# Altium PCB PC110-itx.PcbDoc (part 9 of 16)
Units mm, origin at the board's own origin, x right, y up, seen from the top; angles counter-clockwise.
Board outline 170 x 170 mm, 16 copper layers (FC1, FC2, FC3, FC4, IP1, IC1, IC2, IP2, IP3, IC3, IC4, IP4, BC4, BC3, BC2, BC1), stack 3.903 mm thick; 935 components, 1357 nets, 4698 pads, 3240 vias.
Unrouted connection lines stored in the file: 552.
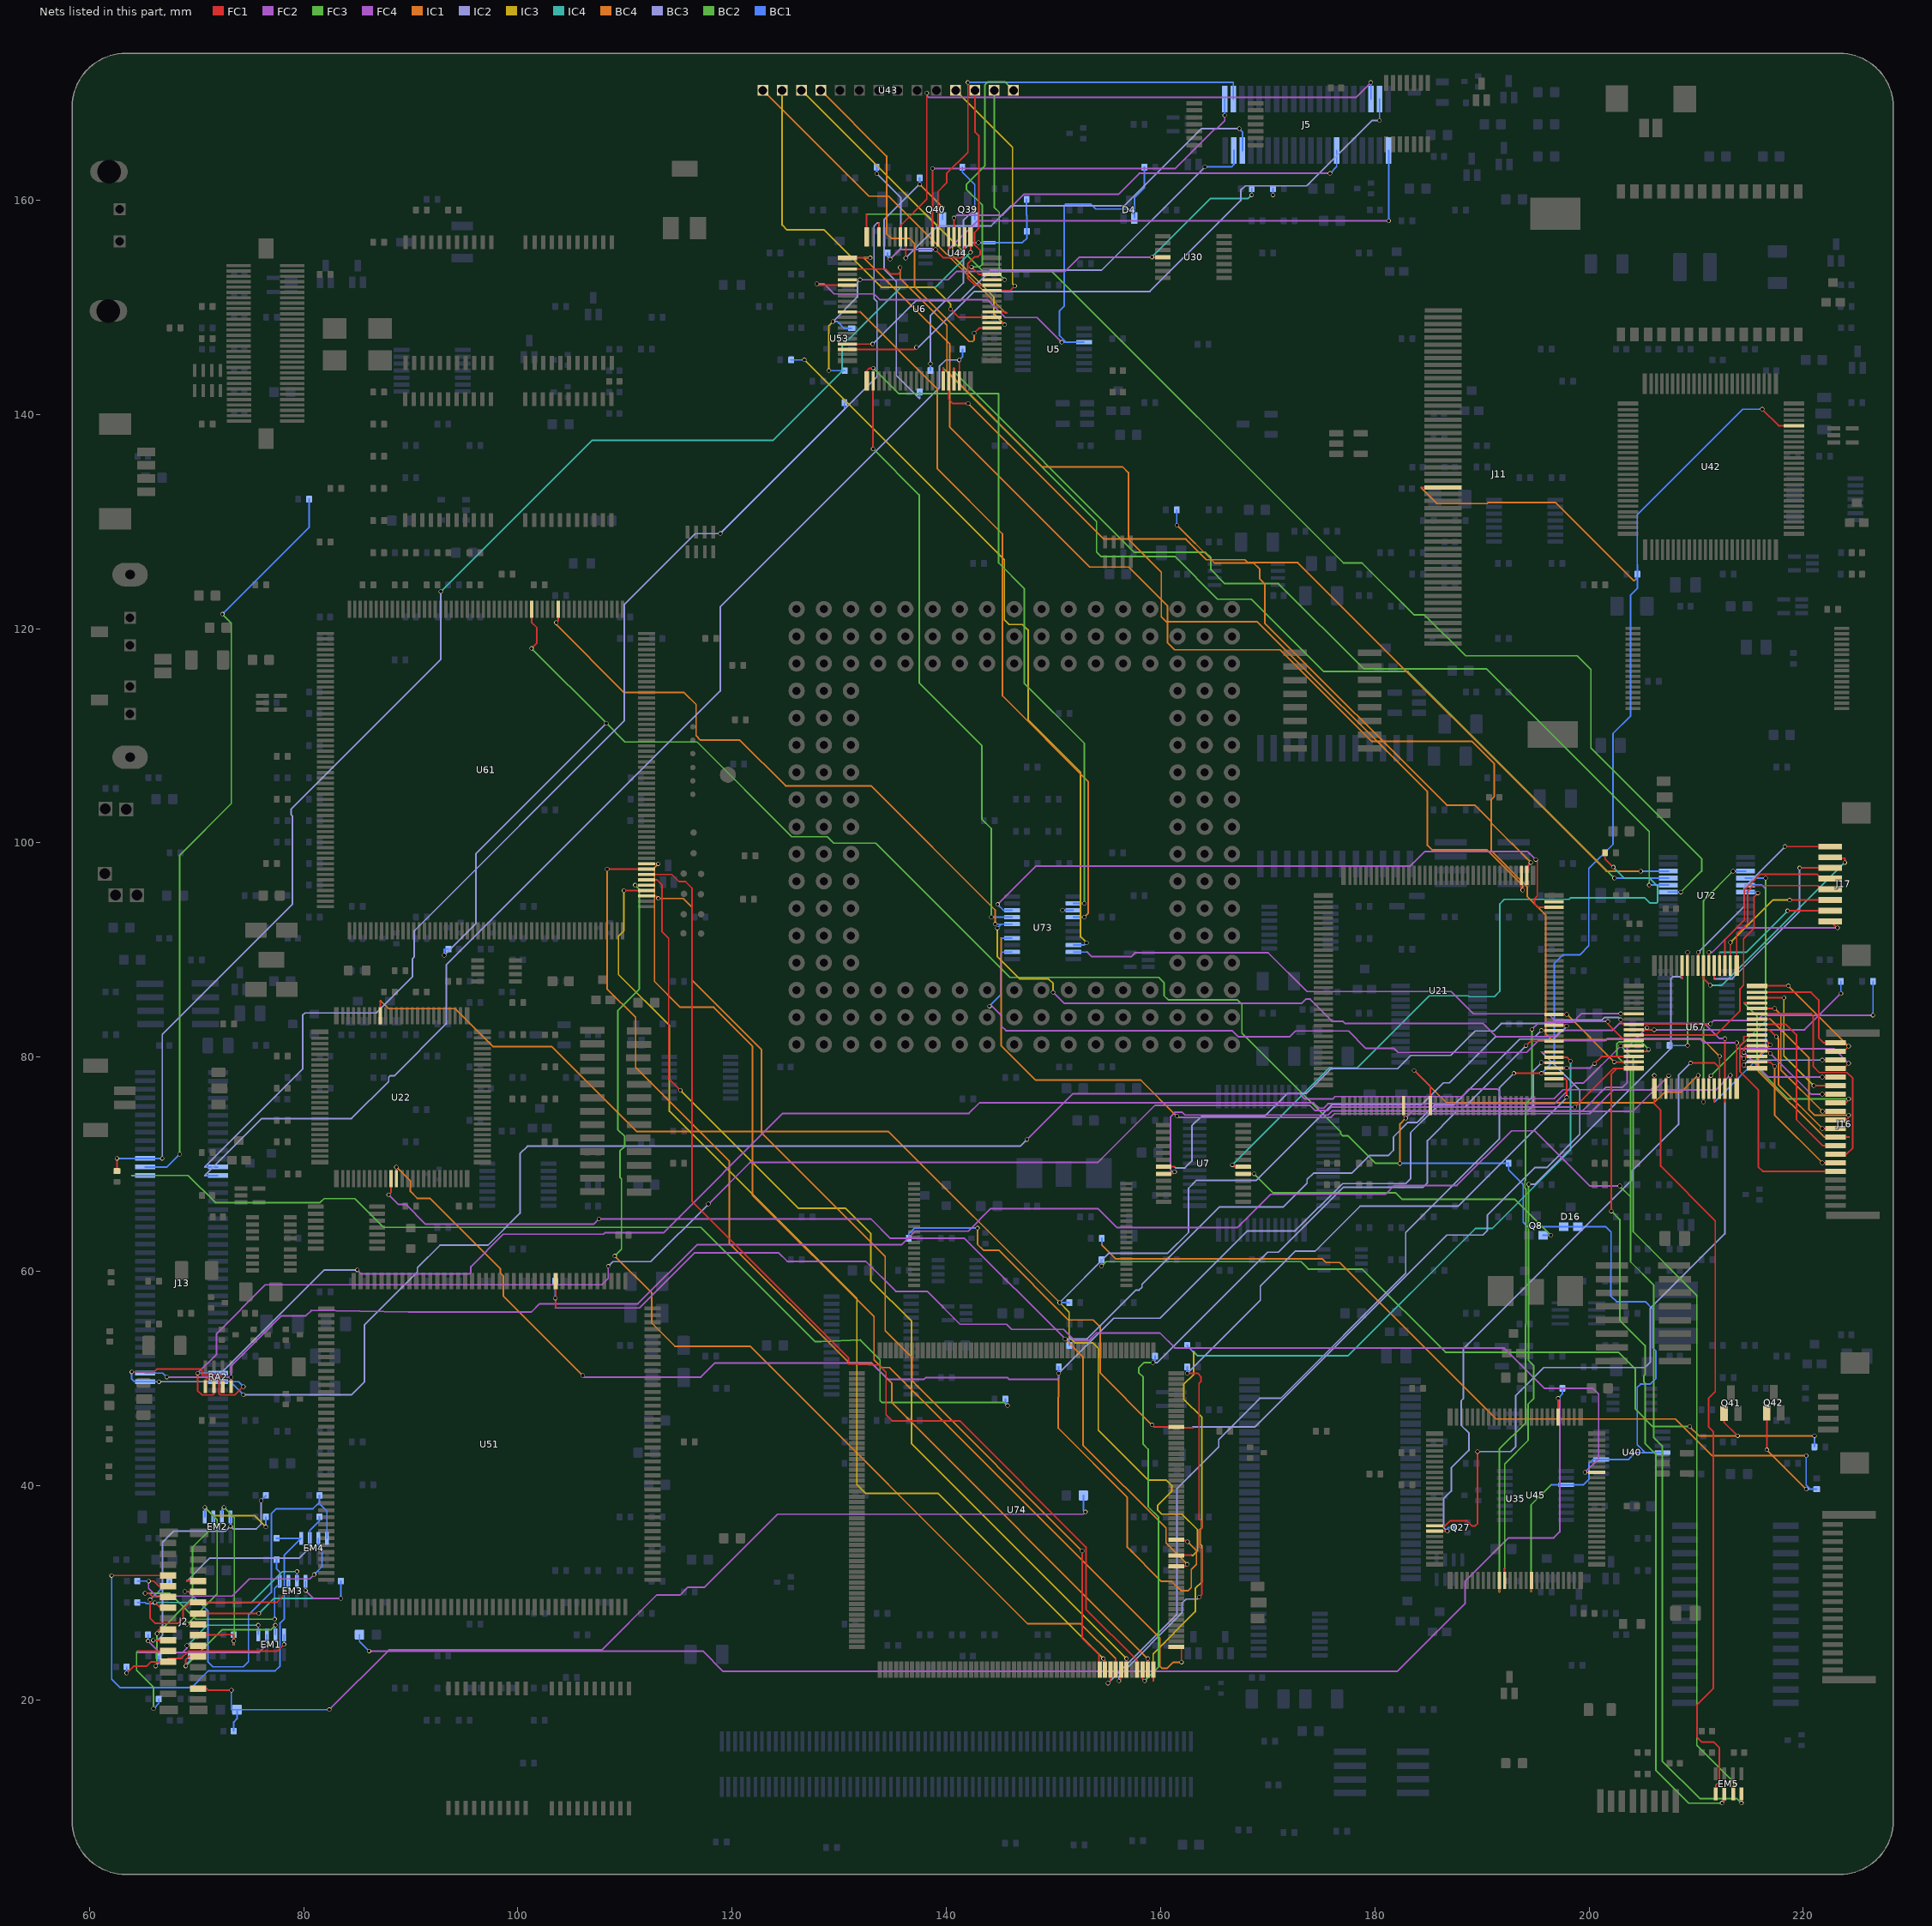
[diagram p22: the nets of this part, all layers, seen from the top]

## Via types
v1: diameter 0.4, hole 0.3, FC1 to BC1, 3240 vias

## Nets (pads, with @x,y where several pads share a name; then routed paths per layer and width w, separated by ;. In a path a pad name is that pad's centre, name@x,y a point inside that pad or via, vN(x,y) a via of type N, cw(c..) or ccw(c..) an arc to the next point about the centre after c; other vN are vias at no path point) (continued)
IRQ4: R384.2 U21.84 U22.36 U74.172 | length 159.7
  FC1 w0.15: v1(87.935,67.158) 88.15,67.373 U22.36@88.15,68.66 ; U74.172@161.458,32.469 162.298,32.469 v1(162.494,32.664) ; U21.84@196.732,82.991 197.831,82.991 v1(197.917,82.906)
  FC2 w0.15: v1(107.568,64.897) 132.969,64.897 134.772,63.094 141.68,63.094 v1(151.084,53.69)
  IC1 w0.15: v1(151.084,53.69) 152.75,52.024 152.75,43.795 160.503,36.043 160.503,34.655 v1(162.494,32.664)
  IC2 w0.15: v1(151.084,53.69) 153.156,53.69 157.723,58.257 158.002,58.257 158.266,58.522 158.266,58.8 165.498,66.031 171.467,66.031 173.677,68.241 173.677,68.58 174.272,69.175 177.837,69.175 179.48,70.818 181.254,70.818 181.74,71.303 181.74,72.545 183.099,73.905 183.963,73.905 185.615,75.557 187.393,75.557 193.522,81.686 196.697,81.686 v1(197.917,82.906)
  FC4 w0.15: v1(87.935,67.158) 88.823,66.269 89.534,66.269 91.389,64.414 107.086,64.414 v1(107.568,64.897)
  BC1 w0.15: v1(151.084,53.69) 151.242,53.69 151.49,53.442 R384.2@151.49,53.09
IRQ5: R387.2 U21.83 U22.92 U74.174 | length 171.4
  FC1 w0.15: U22.92@87.15,83.86 87.15,85.22 ; U74.174@161.458,33.469 162.154,33.469 162.212,33.527 162.864,33.527 ; v1(195.546,82.491) U21.83@196.732,82.491
  IC2 w0.15: v1(150.571,57.09) 155.178,61.697 160.655,61.697 162.608,63.65 162.608,67.765 163.347,68.504 168.949,68.504 176.01,75.565 184.379,75.565 186.42,77.606 186.979,77.606 191.288,81.916 194.971,81.916 v1(195.546,82.491)
  IC3 w0.15: v1(150.571,57.09) 151.46,56.201 151.46,53.873 151.994,53.34 153.67,53.34 154.178,52.832 154.178,45.187 158.852,40.513 160.528,40.513 161.061,39.98 161.061,39.497 159.715,38.151 159.715,37.744 160.122,37.338 162.001,37.338 163.449,35.89 163.449,33.934 162.984,33.469 162.864,33.527
  BC4 w0.15: 87.15,85.22 87.198,85.268 87.935,84.531 94.139,84.531 97.696,80.975 103.183,80.975 111.081,73.076 134.585,73.076 v1(150.571,57.09)
  BC1 w0.15: v1(150.571,57.09) R387.2@151.49,57.09
IRQ7: R389.2 U21.81 U22.37 U74.177 | length 169.2
  FC1 w0.15: U22.37@88.65,68.66 v1(88.65,69.748) ; U74.177@161.458,34.969 162.154,34.969 162.223,34.9 162.375,34.9 v1(162.509,34.766) ; v1(194.115,81.085) 194.521,81.491 U21.81@196.732,81.491
  IC1 w0.15: v1(88.65,69.748) 89.966,68.432 89.966,67.462 90.601,66.828 91.795,66.828 98.376,60.247 98.376,59.837 98.654,59.56 98.654,57.683 v1(106.045,50.292) ; 150.49,50.089 150.495,50.089 ; 150.49,50.094 150.495,50.089 ; v1(162.509,34.766) 163.347,33.928 163.347,32.639 162.864,32.156 162.864,30.501 162.571,30.208 161.893,30.208 161.036,31.064 160.071,31.064 156.896,34.239 156.896,38.913 150.444,45.364 150.444,48.26 150.495,48.311 150.495,50.089
  IC2 w0.15: v1(150.49,50.49) 155.626,55.626 159.944,55.626 168.097,63.779 172.568,63.779 176.987,68.199 182.88,68.199 183.337,68.656 183.337,72.942 185.723,75.327 188.357,75.327 v1(194.115,81.085)
  FC4 w0.15: v1(106.045,50.292) 106.197,50.14 117.095,50.14 118.415,51.461 132.987,51.461 134.517,49.932 137.928,49.932 138.085,50.089 145.696,50.089 145.859,49.925 150.326,49.925 150.49,50.089
  BC1 w0.15: 150.49,50.094 v1(150.49,50.49) R389.2@150.49,51.09
IRQ9: R325.2 U21.79 U74.198 | length 97
  FC1 w0.15: v1(159.197,45.672) 159.4,45.469 U74.198@161.458,45.469 162.133,45.469 162.133,45.411 162.959,45.411 ; 195.556,80.491 U21.79@196.732,80.491
  IC2 w0.15: 162.959,45.411 163.017,45.469 168.786,45.469 186.715,63.398 190.094,63.398 190.5,63.805 190.5,65.253 194.946,69.698 196.038,69.698 199.136,72.796 199.136,76.911 195.556,80.491
  BC4 w0.15: v1(142.9,64.041) 142.9,62.535 143.459,61.976 144.882,61.976 151.384,55.474 153.695,55.474 154.366,54.803 154.366,50.503 v1(159.197,45.672)
  BC1 w0.15: R325.2@136.49,63.09 136.49,63.523 137.008,64.041 v1(142.9,64.041)
IRQ10: R394.2 U21.78 U74.156 | length 89
  FC1 w0.15: 159.308,21.793 U74.156@159.308,22.819 ; U21.78@196.732,79.991 197.917,79.991 v1(198.272,79.635)
  IC3 w0.15: 159.309,21.792 159.309,24.308 163.246,28.245 163.246,30.404 163.855,31.013 163.855,34.392 163.703,34.544 163.703,35.942 163.855,36.093 163.855,46.381 162.154,48.082 162.154,49.454 163.093,50.394 163.093,52.474 ; 163.056,52.474 163.093,52.474 ; 163.115,52.474 163.093,52.474
  IC4 w0.15: 163.115,52.474 163.469,52.121 177.495,52.121 189.389,64.015 190.964,64.015 198.272,71.323 v1(198.272,79.635)
  BC1 w0.15: R394.2@162.49,53.09 162.49,53.04 163.056,52.474
IRQ11: R396.2 U21.77 U74.154 | length 87.2
  FC1 w0.15: U74.154@158.308,22.819 158.308,21.971 v1(158.511,21.768) ; v1(195.555,79.502) 195.566,79.491 U21.77@196.732,79.491
  FC3 w0.15: v1(158.511,21.768) 159.817,23.073 159.817,37.059 158.845,38.03 158.845,43.39 158.369,43.866 158.369,50.13 157.963,50.536 157.963,51.003 158.45,51.49 v1(159.287,51.49)
  IC2 w0.15: v1(159.287,51.49) 159.693,51.49 170.001,61.798 170.993,61.798 177.063,67.869 184.506,67.869 184.912,68.275 184.912,72.212 187.655,74.955 194.259,74.955 194.793,75.489 194.793,78.74 v1(195.555,79.502)
  BC1 w0.15: v1(159.287,51.49) 159.49,51.693 R396.2@159.49,52.09
IRQ14: J11.24 R365.1 U21.75 U42.46 U74.148 | length 181
  FC1 w0.15: v1(155.092,21.565) 155.308,21.78 U74.148@155.308,22.819 ; 184.328,133.173 J11.24@186.358,133.173 ; v1(192.969,78.491) v1(195.555,78.491) U21.75@196.732,78.491 ; v1(216.154,140.487) 217.691,138.95 U42.46@219.127,138.95
  BC4 w0.15: 184.328,133.172 185.815,131.685 190.475,131.685 190.565,131.775 196.875,131.775 204.165,124.485 204.231,124.485
  BC3 w0.15: v1(155.092,21.565) 161.533,28.006 161.533,39.726 165.431,43.623 165.431,44.317 169.266,48.151 171.214,48.151 182.88,59.817 182.88,63.626 191.618,72.364 191.618,77.14 v1(192.969,78.491)
  BC1 w0.15: v1(195.555,78.491) 196.748,79.685 196.748,88.748 197.545,89.545 199.12,89.545 199.974,90.399 199.974,97.612 202.235,99.873 202.235,110.211 203.886,111.862 203.886,123.139 204.51,123.763 204.51,124.765 ; 204.231,124.485 204.51,124.765 ; v1(216.154,140.487) 214.325,140.487 204.495,130.658 204.495,125.984 204.51,125.969 R365.1@204.51,125.09 204.51,124.765
IRQ15: R391.2 U21.74 U74.150 | length 85.5
  FC1 w0.15: v1(156.108,21.768) 156.308,21.967 U74.150@156.308,22.819 ; v1(162.49,50.49) 163.454,50.49 163.779,50.165 163.779,49.759 163.585,49.564 163.585,36.913 163.855,36.642 163.855,36.017 163.601,35.763 163.601,34.29 163.855,34.036 163.855,29.845 v1(163.601,29.591) ; U21.74@196.732,77.991 197.714,77.991 197.917,77.788 v1(197.917,76.251)
  IC2 w0.15: v1(162.49,50.49) 169.316,57.316 169.316,58.649 172.556,61.888 174.416,61.888 178.618,66.09 187.756,66.09 v1(197.917,76.251)
  BC3 w0.15: v1(156.108,21.768) 156.108,22.225 162.001,28.118 162.001,29.032 162.38,29.411 163.421,29.411 v1(163.601,29.591)
  BC1 w0.15: v1(162.49,50.49) R391.2@162.49,51.09
KB1_0: J17.8 U67.56 | length 18.7
  FC1 w0.15: U67.56@210.185,88.558 v1(210.185,89.789) ; v1(218.288,99.663) J17.8@222.504,99.663
  IC2 w0.15: v1(210.185,89.789) 214.459,94.063 214.459,95.834 v1(218.288,99.663)
KB1_1: J17.7 U67.55 | length 21.2
  FC1 w0.15: U67.55@210.685,88.558 210.685,87.333 v1(211.303,86.716) ; J17.7@222.504,98.663 223.876,98.552 v1(223.876,98.171)
  IC4 w0.15: v1(211.303,86.716) 212.42,86.716 v1(223.876,98.171)
KB1_2: J17.1 U67.54 | length 15.1
  FC1 w0.15: U67.54@211.185,88.558 v1(211.185,89.789) ; J17.1@222.504,92.663 v1(223.19,92.075)
  FC4 w0.15: v1(211.185,89.789) 211.48,89.789 213.766,92.075 v1(223.19,92.075)
KB1_3: J17.6 U67.53 | length 18.7
  FC1 w0.15: 211.685,87.327 U67.53@211.685,88.558 ; v1(219.659,97.663) J17.6@222.504,97.663
  IC2 w0.15: 211.685,87.327 211.684,87.325 213.361,87.325 219.659,93.623 v1(219.659,97.663)
KB1_4: J17.2 U67.52 | length 13.2
  FC1 w0.15: U67.52@212.185,88.558 212.185,89.782 ; v1(218.542,93.663) J17.2@222.504,93.663
  IC4 w0.15: 212.185,89.782 212.192,89.789 214.668,89.789 v1(218.542,93.663)
KB1_5: J17.5 U67.51 | length 16.6
  FC1 w0.15: U67.51@212.685,88.558 212.685,90.994 214.503,92.812 214.503,95.606 215.976,97.079 221.275,97.079 221.691,96.663 J17.5@222.504,96.663
KB1_6: J17.3 U67.50 | length 13.1
  FC1 w0.15: U67.50@213.185,88.558 v1(213.185,90.706) ; v1(218.719,94.663) J17.3@222.504,94.663
  IC3 w0.15: v1(213.185,90.706) 217.142,94.663 v1(218.719,94.663)
KB1_7: J17.4 U67.49 | length 15.4
  FC1 w0.15: U67.49@213.785,88.558 213.785,91.484 214.808,92.507 214.808,95.504 215.316,96.012 221.342,96.012 221.691,95.663 J17.4@222.504,95.663
KB2_1: J16.18 U67.33 | length 10.2
  FC1 w0.15: v1(214.452,79.273) 214.452,79.085 U67.33@215.685,78.958 ; v1(221.767,79.731) 221.78,79.743 J16.18@223.012,79.743
  IC2 w0.15: v1(214.452,79.273) 214.909,79.731 v1(221.767,79.731)
KB2_2: J16.6 U67.34 | length 13.9
  FC1 w0.15: U67.34@215.685,79.558 216.911,79.558 v1(217.322,79.146) ; v1(221.767,70.143) J16.6@223.012,70.143
  IC1 w0.15: v1(217.322,79.146) 217.322,74.588 v1(221.767,70.143)
KB2_3: J16.17 U67.35 | length 14.5
  FC1 w0.15: v1(214.452,79.858) 214.653,80.058 U67.35@215.685,80.058 ; J16.17@223.012,78.943 223.749,78.943 v1(224.231,79.426)
  FC2 w0.15: v1(214.452,79.858) 214.097,80.213 214.097,80.67 214.224,80.797 222.859,80.797 v1(224.231,79.426)
KB2_4: J16.14 U67.36 | length 9
  FC1 w0.15: U67.36@215.685,80.558 216.713,80.558 v1(216.916,80.355) ; v1(221.767,76.543) J16.14@223.012,76.543
  FC4 w0.15: v1(216.916,80.355) 220.728,76.543 v1(221.767,76.543)
KB2_5: J16.16 U67.37 | length 11.2
  FC1 w0.15: v1(214.452,80.442) 214.452,80.829 214.681,81.058 U67.37@215.685,81.058 ; v1(221.767,78.143) J16.16@223.012,78.143
  FC2 w0.15: v1(214.452,80.442) 216.751,78.143 v1(221.767,78.143)
KB2_6: J16.9 U67.38 | length 16.6
  FC1 w0.15: U67.38@215.685,81.558 216.637,81.558 216.637,81.432 v1(216.916,81.153) ; J16.9@223.012,72.543 224.256,72.543
  BC4 w0.15: v1(216.916,81.153) 215.798,80.035 215.798,78.689 221.945,72.542 224.257,72.542
KB2_7: J16.5 U67.39 | length 21.7
  FC1 w0.15: U67.39@215.685,82.058 214.452,81.931 214.452,81.458 214.097,81.102 214.097,78.664 215.798,76.962 215.798,69.749 216.205,69.343 J16.5@223.012,69.343
KB2_8: J16.10 U67.40 | length 13.7
  FC1 w0.15: U67.40@215.685,82.558 216.832,82.558 v1(217.474,81.916) ; v1(221.767,73.343) J16.10@223.012,73.343
  IC1 w0.15: v1(217.474,81.916) 217.677,81.712 217.677,77.433 v1(221.767,73.343)
KB2_9: J16.8 U67.41 | length 16.6
  FC1 w0.15: U67.41@215.685,83.058 218.389,83.058 219.354,82.093 219.354,74.181 221.793,71.743 J16.8@223.012,71.743
KB2_10: J16.11 U67.42 | length 16.6
  FC1 w0.15: U67.42@215.685,83.558 216.908,83.558 ; J16.11@223.012,74.143 224.003,74.143 224.231,74.371 v1(224.231,74.574)
  BC4 w0.15: 216.908,83.558 216.916,83.566 220.523,79.959 220.523,75.133 221.082,74.574 v1(224.231,74.574)
KB2_11: J16.7 U67.43 | length 22.6
  FC1 w0.15: U67.43@215.685,84.058 220.767,84.058 220.929,83.896 220.929,79.121 221.488,78.562 224.079,78.562 224.612,78.029 224.612,71.526 224.029,70.943 J16.7@223.012,70.943
KB2_12: J16.12 U67.44 | length 14.3
  FC1 w0.15: U67.44@215.685,84.558 v1(217.321,84.558) ; v1(221.78,74.943) J16.12@223.012,74.943
  IC1 w0.15: v1(217.321,84.558) 217.907,83.972 217.907,78.815 v1(221.78,74.943)
KB2_13: J16.13 U67.45 | length 19
  FC1 w0.15: 214.459,85.058 U67.45@215.685,85.058 ; J16.13@223.012,75.743 223.977,75.743 224.231,75.997 v1(224.231,76.098)
  BC2 w0.15: 214.459,85.058 215.697,83.82 215.697,78.994 218.592,76.098 v1(224.231,76.098)
KB2_14: J16.15 U67.46 | length 13.9
  FC1 w0.15: U67.46@215.685,85.558 v1(218.186,85.558) ; v1(220.98,77.343) J16.15@223.012,77.343
  IC3 w0.15: v1(218.186,85.558) 218.186,80.137 v1(220.98,77.343)
KB2_15: J16.20 U67.47 | length 11.4
  FC1 w0.15: U67.47@215.685,86.058 220.723,86.058 221.437,85.344 221.437,81.8 221.894,81.343 J16.20@223.012,81.343
KB2_16: J16.19 U67.48 | length 12.3
  FC1 w0.15: U67.48@215.685,86.658 v1(218.599,86.658) ; J16.19@223.012,80.543 223.749,80.543 v1(224.231,81.026)
  IC1 w0.15: v1(218.599,86.658) v1(224.231,81.026)
KB_CAPLED#: U67.27 U72.4 | length 23.7
  FC1 w0.15: U67.27@211.185,77.058 211.185,78.089 v1(211.379,78.283)
  FC3 w0.15: v1(211.379,78.283) 216.484,83.388 v1(216.484,96.715)
  BC1 w0.15: U72.4@214.6,96.715 v1(216.484,96.715)
KB_CNTR#: U35.61 U67.59 | length 65.8
  FC1 w0.15: U35.61@192.12,31.15 192.12,32.227 ; 208.685,87.327 U67.59@208.685,88.558
  FC3 w0.15: 192.12,32.227 192.126,32.233 192.126,42.037 194.308,44.22 194.308,47.623 194.843,48.158 194.843,51.181 194.361,51.664 v1(194.361,68.148)
  IC2 w0.15: v1(194.361,68.148) 194.97,68.148 207.624,80.802 207.624,87.325 207.8,87.501 208.51,87.501 208.685,87.327
KB_INIT1: EM5.5 J13.14 RA2.5 U67.17 | length 235
  FC1 w0.15: RA2.5@70.825,49.24 70.825,49.886 70.952,50.013 71.882,50.013 72.111,49.784 72.111,48.565 72.212,48.463 73.584,48.463 v1(74.371,49.251) ; v1(206.096,78.288) 206.085,78.278 U67.17@206.085,77.058 206.085,75.652 206.68,75.057 206.68,69.825 211.785,64.719 211.785,48.768 211.15,48.133 211.15,45.491 211.607,45.034 211.607,21.09 210.083,19.566 210.083,16.498 210.515,16.067 211.619,16.067 212.166,15.519 212.166,12.37 211.825,12.029 EM5.5@211.825,11.24
  FC2 w0.15: v1(147.523,72.314) 151.785,76.576 172.984,76.576 173.462,76.098 176.06,76.098 176.29,76.328 188.113,76.328 188.824,77.038 191.414,77.038 191.618,76.834 191.618,76.403 191.898,76.124 196.723,76.124 197.561,76.962 205.765,76.962 206.096,77.292 v1(206.096,78.288)
  IC2 w0.15: v1(74.371,48.489) 84.48,48.489 85.674,49.682 85.674,55.009 90.617,59.951 90.617,60.339 92.732,62.454 97.227,62.454 100.203,65.43 100.203,71.001 100.891,71.689 146.898,71.689 v1(147.523,72.314)
  BC1 w0.15: J13.14@72.008,49.703 73.157,49.703 ; v1(74.371,48.489) 73.157,49.703 ; v1(74.371,49.251) 73.919,49.703 73.157,49.703
KB_INIT2: EM5.6 J13.15 RA2.6 U67.16 | length 230
  FC1 w0.15: v1(70.104,50.503) 70.104,48.87 70.51,48.463 71.523,48.463 71.625,48.565 RA2.6@71.625,49.24 ; v1(198.664,75.336) 202.286,78.958 202.605,78.958 ; v1(202.082,65.634) 202.082,78.435 202.605,78.958 ; U67.16@204.185,78.958 202.605,78.958 ; v1(212.42,10.363) 212.625,10.568 EM5.6@212.625,11.24
  FC3 w0.15: v1(202.082,65.634) 202.87,64.846 202.87,55.448 205.232,53.086 205.232,50.377 205.12,50.265 205.12,49.667 205.232,49.555 205.232,43.942 206.223,42.951 206.223,13.437 209.296,10.363 v1(212.42,10.363)
  IC2 w0.15: v1(108.433,60.477) 108.864,60.909 112.394,60.909 v1(117.78,66.294)
  FC4 w0.15: v1(70.104,50.503) 71.882,52.281 71.882,54.204 76.429,58.75 107.848,58.75 108.433,59.334 v1(108.433,60.477) ; v1(117.78,66.294) 121.666,70.18 154.153,70.18 159.486,75.514 173.925,75.514 174.421,75.018 175.591,75.018 175.91,75.336 v1(198.664,75.336)
  BC1 w0.15: v1(70.104,50.503) J13.15@72.008,50.503
KB_INIT3: EM5.8 J13.86 RA2.8 U67.13 | length 237.3
  FC1 w0.15: RA2.8@73.225,49.24 v1(73.225,50.12) ; U67.13@204.185,80.558 205.399,80.558 v1(205.562,80.721) ; v1(214.225,10.363) EM5.8@214.225,11.24
  FC3 w0.15: v1(202.87,67.97) 203.875,66.965 ; v1(205.562,80.721) 204.851,81.432 202.794,81.432 202.59,81.229 202.59,80.137 203.875,78.852 203.875,66.965 ; v1(214.225,10.363) 213.819,10.77 210.363,10.77 206.832,14.3 206.832,43.713 206.033,44.512 206.033,58.736 203.875,60.895 203.875,66.965
  FC4 w0.15: v1(67.216,50.14) 73.205,50.14 v1(73.225,50.12) 73.225,51.152 77.927,55.855 80.213,55.855 80.721,56.363 89.79,56.21 101.269,56.21 102.032,56.972 111.201,56.972 116.713,62.484 135.814,62.484 137.084,63.754 142.037,63.754 144.145,65.862 154.152,65.862 155.905,64.11 167.183,64.11 170.272,67.199 180.998,67.199 181.821,68.021 187.655,68.021 192.761,73.127 194.945,73.127 200.101,67.97 v1(202.87,67.97)
  BC1 w0.15: J13.86@65.207,50.503 66.853,50.503 v1(67.216,50.14)
KB_INIT4: EM5.7 J13.87 RA2.7 U67.12 | length 239.4
  FC1 w0.15: v1(63.957,50.622) 66.04,50.622 66.319,50.902 70.393,50.902 70.495,50.8 70.495,50.317 72.136,50.317 72.45,50.003 RA2.7@72.45,49.24 ; v1(202.955,81.058) U67.12@204.185,81.058 ; EM5.7@213.45,11.24 213.45,11.95 v1(213.653,12.153)
  FC3 w0.15: v1(202.955,81.058) 204.114,79.899 204.114,63.703 210.058,57.76 210.058,15.748 v1(213.653,12.153)
  IC2 w0.15: v1(66.489,49.703) 71.496,49.703 81.94,60.147 v1(85.014,60.147)
  FC4 w0.15: v1(85.014,60.147) 85.395,59.766 95.453,59.766 95.614,59.927 95.614,60.449 98.635,63.471 107.979,63.471 108.11,63.602 113.589,63.602 124.739,74.752 142.113,74.752 143.104,75.744 174.294,75.744 174.79,75.248 175.222,75.248 175.628,75.654 196.787,75.654 198.73,77.597 199.494,77.597 v1(202.955,81.058)
  BC1 w0.15: v1(63.957,50.622) 63.957,49.957 64.211,49.703 J13.87@65.207,49.703 v1(66.489,49.703)
KB_IRQ1: U21.86 U67.15 | length 9.3
  FC1 w0.15: U21.86@196.732,83.991 v1(197.917,83.991) ; v1(202.35,79.558) U67.15@204.185,79.558
  BC4 w0.15: v1(197.917,83.991) v1(202.35,79.558)
KB_IRQ12: U21.76 U67.14 | length 7.9
  FC1 w0.15: U21.76@196.732,78.991 v1(197.917,78.991) ; v1(200.51,79.4) 201.168,80.058 U67.14@204.185,80.058
  FC2 w0.15: v1(197.917,78.991) 200.101,78.991 v1(200.51,79.4)
KB_KBCSMI: U67.32 U73.12 | length 84
  FC1 w0.15: U67.32@213.785,77.058 v1(213.785,81.356)
  FC2 w0.15: v1(144.018,84.76) 144.272,84.76 145.136,83.896 145.136,82.906 145.567,82.474 166.675,82.474 167.234,81.915 172.06,81.915 172.593,82.448 177.546,82.448 179.172,80.823 181.788,80.823 182.169,80.442 194.182,80.442 195.299,81.559 201.524,81.559 201.676,81.711 210.338,81.711 210.693,81.356 v1(213.785,81.356)
  BC1 w0.15: v1(144.018,84.76) 145.059,85.801 145.059,89.611 145.263,89.815 U73.12@146.137,89.815
KB_NUMLED#: U67.26 U72.3 | length 25.1
  FC1 w0.15: v1(210.685,75.819) U67.26@210.685,77.058
  FC3 w0.15: v1(210.685,75.819) 210.685,94.607 v1(213.436,97.358)
  BC1 w0.15: v1(213.436,97.358) 213.443,97.365 U72.3@214.6,97.365
KB_PADLED#: U67.28 U72.5 | length 25.1
  FC1 w0.15: 211.685,75.82 U67.28@211.685,77.058
  BC1 w0.15: 211.685,75.82 216.484,80.62 216.484,95.709 216.129,96.065 U72.5@214.6,96.065
KB_RESET#: C267.2 D16.1 D16.3 R109.2 U21.48 U35.66 U40.4 U40.10 U45.3 U61.70 U67.19 | length 244.2
  FC1 w0.15: v1(101.27,118.161) 101.777,118.668 101.777,120.092 101.278,120.591 U61.70@101.278,121.807 ; U21.48@182.682,75.491 182.682,74.514 v1(182.885,74.311) ; 194.589,30.099 194.62,30.13 U35.66@194.62,31.15 ; U67.19@207.185,77.058 207.185,78.026 v1(207.442,78.283)
  FC2 w0.15: v1(182.885,74.311) 183.53,74.955 204.114,74.955 v1(207.442,78.283)
  FC3 w0.15: 194.589,30.099 194.589,38.202 196.453,40.065
  IC1 w0.15: v1(182.347,70.079) 182.347,73.772 v1(182.885,74.311)
  BC2 w0.15: v1(101.27,118.161) v1(108.255,111.176) 110.007,109.423 116.738,109.423 125.578,100.584 128.88,100.584 129.489,99.974 133.401,99.974 145.924,87.451 159.843,87.451 160.325,86.97 160.325,85.75 160.731,85.344 167.183,85.344 167.589,84.938 167.589,82.245 176.81,73.024 176.81,72.847 176.987,72.67 177.495,72.67 180.075,70.09 182.347,70.09 182.358,70.09 v1(182.347,70.079)
  BC3 w0.15: v1(93.116,89.51) 96.088,92.481 96.088,99.009 v1(108.255,111.176)
  BC1 w0.15: v1(93.116,89.51) 93.116,90.09 C267.2@93.52,90.09 ; v1@182.358,70.09 R109.2@192.49,70.09 192.49,69.49 193.853,68.127 193.853,64.578 194.259,64.172 D16.1@197.622,64.172 D16.3@198.947,64.172 201.574,64.172 202.057,63.689 202.057,60.173 202.032,60.147 202.032,57.709 202.565,57.175 205.257,57.175 205.943,56.49 205.943,52.857 206.223,52.578 206.223,49.987 205.715,49.479 204.8,49.479 204.495,49.174 204.495,43.827 205.232,43.09 ; 196.453,40.065 U45.3@197.862,40.065 199.45,40.065 200,40.615 200,42.084 200.355,42.44 U40.10@201.138,42.44 203.657,42.44 204.307,43.09 205.232,43.09 ; U40.4@206.863,43.09 205.232,43.09
KB_RXD: U67.11 U73.9 | length 56.2
  FC1 w0.15: v1(201.752,83.337) 201.752,83.116 203.31,81.558 U67.11@204.185,81.558
  FC2 w0.15: 153.161,89.815 153.187,89.789 153.187,89.762 153.567,89.383 157.251,89.383 157.607,89.738 170.053,89.738 173.66,86.131 187.122,86.131 189.205,84.048 196.19,84.048 196.901,83.337 v1(201.752,83.337)
  BC1 w0.15: U73.9@151.862,89.815 153.161,89.815
KB_SCLK#: R45.1 U7.8 U67.9 | length 78.7
  FC1 w0.15: U7.8@160.288,69.115 161.139,69.115 v1(161.315,69.291) ; U67.9@204.185,82.558 205.212,82.558 ; v1(205.415,82.761) 205.212,82.558 ; v1(206.07,82.558) 205.415,82.558 205.212,82.558
  FC4 w0.15: v1(161.315,69.291) 161.104,69.291 160.934,69.461 160.934,74.447 161.341,74.854 162.019,74.854 162.273,74.6 175.634,74.6 176.014,74.981 199.365,74.981 201.574,77.191 203.124,77.191 203.556,77.622 203.556,80.902 v1(205.415,82.761) ; v1(206.07,82.558) 220.114,82.558 v1(223.51,85.954)
  BC1 w0.15: v1(223.51,85.954) R45.1@223.51,87.09
KB_SCLK_shift: Q8.3 U7.17 | length 31.8
  FC1 w0.15: U7.17@167.712,69.115 v1(168.731,69.115)
  BC2 w0.15: v1(168.731,69.115) 170.511,67.335 181.966,67.335 182.575,66.726 193.083,66.726 v1(196.436,63.373)
  BC1 w0.15: Q8.3@195.7,63.365 196.428,63.365 v1(196.436,63.373)
KB_SCRLED#: U21.53 U67.25 | length 34
  FC1 w0.15: v1(183.667,78.765) 185.182,77.251 U21.53@185.182,75.491 ; U67.25@210.185,77.058 v1(210.185,78.308)
  BC4 w0.15: v1(183.667,78.765) 186.69,75.743 206.07,75.743 207.086,76.759 208.636,76.759 v1(210.185,78.308)
KB_Sound: R78.1 U67.58 | length 11.6
  FC1 w0.15: U67.58@209.185,88.558 209.185,89.78 v1(209.194,89.789)
  FC3 w0.15: v1(209.194,81.09) v1(209.194,89.789)
  BC1 w0.15: R78.1@207.51,81.09 v1(209.194,81.09)
KB_SPKDN: U35.43 U61.65 U67.30 U73.16 | length 200.9
  FC1 w0.15: v1(103.581,120.58) 103.778,120.777 U61.65@103.778,121.807 ; U35.43@185.57,36.25 186.563,36.25 187.017,36.704 188.595,36.704 189.053,36.246 189.382,36.246 189.586,36.449 v1(189.586,43.18) ; 212.685,75.83 U67.30@212.685,77.058 v1(212.685,81.737)
  FC2 w0.15: v1(149.962,86.055) 150.978,85.039 173.19,85.039 173.571,85.42 173.965,85.42 176.046,83.339 177.037,83.339 177.241,83.134 190.123,83.134 191.354,81.903 196.762,81.903 197.355,82.496 202.187,82.496 202.824,83.134 210.769,83.134 212.166,81.737 v1(212.685,81.737)
  IC3 w0.15: v1(144.755,92.05) 144.755,89.408 146.863,87.3 149.555,87.3 149.962,86.893 v1(149.962,86.055)
  BC4 w0.15: v1(103.581,120.58) 103.581,120.377 109.912,114.046 115.519,114.046 116.637,112.928 116.637,110.007 117.043,109.601 120.723,109.601 124.99,105.334 132.974,105.334 144.551,93.756 v1(144.551,92.415)
  BC3 w0.15: v1(189.586,43.18) 192.684,43.18 193.142,43.637 193.142,48.387 195.783,51.029 205.232,51.029 205.715,51.511 205.715,56.54 212.674,63.5 212.674,75.819 212.685,75.83
  BC1 w0.15: v1(144.551,92.415) 145.12,92.415 ; v1(144.755,92.05) 145.12,92.415 ; U73.16@146.137,92.415 145.12,92.415
KB_SPKUP: Q27.3 R268.1 U35.44 U67.29 | length 146
  FC1 w0.15: U35.44@185.57,35.75 v1(186.766,35.75) ; v1(209.474,79.451) 211.734,79.451 212.185,79.001 ; U67.29@212.185,77.058 212.185,79.001 ; v1(212.185,80.086) 212.185,79.001
  IC1 w0.15: v1(161.519,129.667) 165.049,126.136 168.681,126.136 169.24,125.578 169.24,124.689 169.723,124.206 169.723,120.523 186.715,103.53 189.334,103.53 190.881,101.983 190.881,99.258 194.224,95.916 194.224,95.006 195.936,93.294 195.936,82.194 196.515,81.615 201.631,81.615 201.727,81.711 210.56,81.711 v1(212.185,80.086)
  BC3 w0.15: v1(186.766,35.75) 186.411,36.106 186.411,38.76 187.141,39.491 187.141,41.652 188.773,43.284 188.773,44.933 188.062,45.644 188.062,47.926 188.268,48.132 188.268,52.784 203.987,68.504 203.987,69.342 208.356,73.711 208.356,78.334 v1(209.474,79.451)
  BC1 w0.15: R268.1@161.51,131.09 161.51,129.676 v1(161.519,129.667) ; v1(186.766,35.75) 186.766,35.966 186.89,36.09 Q27.3@187.35,36.09
KB_SPKUP_DN: J13.63 R262.1 | length 95.2
  BC2 w0.15: 63.966,68.953 63.957,68.961 69.215,68.961 71.755,66.421 81.535,66.421 81.916,66.801 84.767,66.801 87.456,64.112 117.094,64.112 127.761,53.445 128.323,53.445 131.978,53.594 133.807,51.765 133.807,47.955 133.986,47.777 145.416,47.777 v1(145.72,47.473)
  BC1 w0.15: 63.966,68.953 J13.63@65.207,68.953 ; R262.1@145.51,48.09 145.51,47.682 v1(145.72,47.473)
KB_SRDY#: R59.1 U7.7 U67.8 | length 77.9
  FC1 w0.15: U7.7@160.288,69.765 161.307,69.765 ; v1(202.946,83.49) 202.946,83.312 203.2,83.058 U67.8@204.185,83.058 205.06,83.058 205.06,83.116 v1(211.335,83.116)
  FC2 w0.15: v1(211.335,83.116) 211.658,83.439 215.697,83.439 216.179,83.922 v1(226.51,83.922)
  IC2 w0.15: 161.307,69.765 161.4,69.672 162.28,69.672 162.916,70.307 162.916,73.584 163.869,74.537 169.762,74.537 171.835,76.611 173.613,76.611 175.931,78.929 182.129,78.929 183.363,80.162 187.071,80.162 189.359,82.45 191.11,82.45 191.794,83.135 196.622,83.135 196.98,83.492 201.221,83.492 201.447,83.718 202.717,83.718 v1(202.946,83.49)
  BC1 w0.15: v1(226.51,83.922) R59.1@226.51,87.09
KB_SRDY#_shift: R294.1 U7.18 | length 64.2
  FC1 w0.15: v1(166.7,69.952) 166.887,69.765 U7.18@167.712,69.765 ; R294.1@201.49,99.09 201.49,98.509 v1(202.26,97.739)
  IC4 w0.15: v1(166.7,69.952) 175.743,78.995 178.36,78.995 185.09,85.725 188.722,85.725 188.798,85.649 191.16,85.649 191.668,86.157 191.668,94.31 192.094,94.736 198.139,94.736 198.272,94.869 205.207,94.869 205.689,94.386 206.299,94.386 206.4,94.488 206.4,95.936 205.638,96.698 203.302,96.698 v1(202.26,97.739)
KB_TP139: U67.31 U73.14 | length 84.8
  FC1 w0.15: v1(213.182,78.308) 213.185,78.305 U67.31@213.185,77.058
  IC1 w0.15: 145.115,91.115 145.11,91.11 145.11,81.077 148.336,77.851 158.166,77.851 v1(161.519,74.498)
  FC4 w0.15: v1(161.519,74.498) 161.646,74.37 175.864,74.37 176.22,74.727 200.05,74.727 202.26,76.937 211.811,76.937 v1(213.182,78.308)
  BC1 w0.15: 145.115,91.115 U73.14@146.137,91.115
KB_TXD: U67.10 U72.6 | length 23.8
  FC1 w0.15: U67.10@204.185,82.058 211.827,82.058 214.097,84.328 214.097,86.385 214.427,86.716 214.427,91.059 215.417,92.05 215.417,94.971 v1(215.773,95.326)
  BC1 w0.15: U72.6@214.6,95.415 215.684,95.415 v1(215.773,95.326)
KBCCS#: U35.60 U67.6 | length 65.1
  FC1 w0.15: 191.62,30.076 U35.60@191.62,31.15 ; v1(202.946,84.058) U67.6@204.185,84.058
  FC3 w0.15: 191.62,30.076 191.618,30.074 191.618,43.409 194.078,45.869 194.078,55.068 194.105,55.095 194.105,67.694 194.006,67.793 194.006,68.431 194.078,68.503 194.078,75.638 194.666,76.225 v1(194.666,82.601)
  FC4 w0.15: v1(194.666,82.601) 195.2,83.135 195.783,83.135 195.91,83.261 198.476,83.261 199.272,84.058 v1(202.946,84.058)
LA17: U61.3 U74.146 | length 91.6
  FC1 w0.15: U61.3@112.028,95.057 112.867,95.057 v1(113.106,94.818) ; v1(152.679,33.909) 152.679,25.781 154.254,24.206 154.254,23.549 154.308,23.495 U74.146@154.308,22.819
  IC1 w0.15: v1(113.106,94.818) 115.443,94.818 116.243,94.018 116.243,87.211 122.733,80.721 122.733,72.949 134.29,61.392 134.29,54.483 136.779,51.994 136.779,49.809 v1(152.679,33.909)
LA18: U61.4 U74.147 | length 97.8
  FC1 w0.15: v1(109.906,95.557) U61.4@112.028,95.557 ; v1(154.661,23.851) 154.808,23.703 U74.147@154.808,22.819
  IC3 w0.15: v1(109.906,95.557) 109.906,91.796 109.398,91.288 109.398,87.712 114.148,82.962 114.148,74.955 131.648,57.455 131.648,40.107 132.461,39.294 139.217,39.294 v1(154.661,23.851)
LA19: U61.5 U74.149 | length 102.5
  FC1 w0.15: v1(110.947,96.063) 110.953,96.057 U61.5@112.028,96.057 ; U74.149@155.808,22.819 155.808,23.846
  FC3 w0.15: v1(109.042,61.443) 109.677,62.077 109.677,68.657 109.525,68.808 109.525,71.232 109.981,71.689 109.981,72.594 109.319,73.256 109.319,84.325 111.328,86.335 111.328,95.682 v1(110.947,96.063)
  BC4 w0.15: v1(109.042,61.443) 112.497,57.988 112.497,55.169 114.656,53.01 121.691,53.01 147.599,27.102 152.552,27.102 155.808,23.846
LA20: U61.6 U74.151 | length 95.4
  FC1 w0.15: U61.6@112.028,96.557 112.979,96.557 113.462,96.074 113.462,91.694 114.071,91.084 114.071,78.003 v1(115.164,76.911) ; U74.151@156.808,22.819 156.808,23.839 v1(156.82,23.851)
  IC3 w0.15: v1(115.164,76.911) 126.187,65.888 130.607,65.888 132.944,63.551 132.944,59.157 136.754,55.347 136.754,43.917 v1(156.82,23.851)
LA21: U61.7 U74.153 | length 100.2
  FC1 w0.15: U61.7@112.028,97.057 114.376,97.057 115.037,96.397 115.643,96.397 116.243,95.796 116.243,66.56 130.859,51.945 130.859,51.382 133.706,51.257 134.366,50.597 134.366,46.609 134.925,46.05 141.249,46.05 153.034,34.265 153.034,28.449 157.808,23.675 U74.153@157.808,22.819
LA22: U61.8 U74.155 | length 100.6
  FC1 w0.15: v1(108.331,97.557) U61.8@112.028,97.557 ; v1(158.801,23.851) 158.808,23.843 U74.155@158.808,22.819
  IC1 w0.15: v1(108.331,97.557) 108.331,86.385 110.998,83.718 110.998,79.045 119.736,70.307 119.736,62.636 130.911,51.461 133.019,51.461 134.925,49.555 134.925,47.727 v1(158.801,23.851)
LA23: U61.9 U74.157 | length 102.2
  FC1 w0.15: U61.9@112.028,98.057 v1(113.106,98.057) ; U74.157@161.458,24.969 161.95,24.969 v1(161.95,23.52)
  IC1 w0.15: v1(113.106,98.057) 112.751,97.701 112.751,87.071 115.165,84.657 118.289,84.657 121.895,81.051 121.895,67.132 133.25,55.777 133.25,51.738 133.96,51.029 134.696,51.029 159.919,25.806 159.919,23.165 160.121,22.963 160.629,22.963 161.187,23.52 v1(161.95,23.52)
LCD_24: C174.1 EM4.1 J2.24 | length 46.9
  FC1 w0.15: v1(62.078,31.612) J2.24@67.347,31.612
  BC1 w0.15: v1(62.078,31.612) 62.078,21.946 62.89,21.133 69.52,21.133 71.095,22.708 77.343,22.708 77.8,23.165 77.8,27.178 78.207,27.584 78.207,33.522 EM4.1@79.775,35.09 C174.1@77.48,35.09
LCD_B0: C173.1 EM1.4 J2.8 | length 17.5
  FC1 w0.15: v1(63.48,22.5) 64.119,23.139 65.337,23.139 65.761,23.563 J2.8@67.347,23.563 67.347,23.876 68.58,23.876 69.24,24.536 77.54,24.536 v1(78.175,25.171)
  BC1 w0.15: v1(63.48,22.5) C173.1@63.48,23.09 ; v1(78.175,25.171) EM1.4@78.175,26.09
LCD_B1: C183.1 EM1.3 J2.9 | length 13.8
  FC1 w0.15: v1(69,23.165) 69,23.771 69.291,24.062 J2.9@70.147,24.062
  BC2 w0.15: v1@69,23.276 v1(69,23.165) 72.378,26.543 76.937,26.543 v1(77.368,26.975)
  BC1 w0.15: v1@69,23.276 69.48,23.756 C183.1@69.48,24.09 ; v1(77.368,26.975) 77.375,26.968 EM1.3@77.375,26.09
LCD_B2: C194.1 EM1.2 J2.10 | length 23.4
  FC1 w0.15: 64.535,24.563 J2.10@67.347,24.563
  FC3 w0.15: 64.472,24.435 64.44,24.467 ; 64.535,24.563 64.44,24.467 ; v1(65.989,19.177) 65.989,21.177 64.407,22.758 64.407,24.443 64.44,24.467
  FC4 w0.15: 64.472,24.435 75.838,24.435 v1(76.575,25.171)
  BC1 w0.15: v1(65.989,19.177) 66.48,19.668 C194.1@66.48,20.09 ; v1(76.575,25.171) EM1.2@76.575,26.09
LCD_B3: C181.1 EM1.1 J2.11 | length 14.4
  FC1 w0.15: v1(69.113,25.062) J2.11@70.147,25.062
  FC2 w0.15: v1(65.48,25.5) 66.571,24.409 68.682,24.409 69.113,24.841 v1(69.113,25.062)
  IC4 w0.15: v1(69.113,25.062) 71.026,26.975 v1(75.768,26.975)
  BC1 w0.15: v1(65.48,25.5) C181.1@65.48,26.09 ; v1(75.768,26.975) 75.775,26.968 EM1.1@75.775,26.09
LCD_B4: C180.1 EM3.4 J2.17 | length 20
  FC1 w0.15: J2.17@70.147,28.062 v1(75.814,28.062)
  IC4 w0.15: v1(75.814,28.062) 77.216,29.464 v1(83.48,29.464)
  FC4 w0.15: v1(80.175,30.21) 80.921,29.464 v1(83.48,29.464)
  BC1 w0.15: v1(80.175,30.21) EM3.4@80.175,31.09 ; v1(83.48,29.464) C180.1@83.48,31.09
LCD_G0: C182.1 EM3.3 J2.18 | length 18.5
  FC1 w0.15: v1(66.116,29.09) 66.594,28.612 J2.18@67.347,28.612
  IC4 w0.15: v1(66.116,29.09) 75.115,29.09 78.003,31.979 v1(79.375,31.979)
  BC1 w0.15: C182.1@64.48,29.09 65.196,29.09 65.304,28.982 66.008,28.982 v1(66.116,29.09) ; EM3.3@79.375,31.09 v1(79.375,31.979)
LCD_G1: C187.1 EM3.2 J2.19 | length 20.2
  FC1 w0.15: v1(65.659,29.337) 65.659,27.635 66.142,27.153 68.275,27.153 68.732,27.61 68.732,28.448 69.397,29.113 J2.19@70.147,29.113 77.5,29.113 v1(78.588,30.201)
  BC1 w0.15: v1(65.659,29.337) 66.913,30.591 67.48,30.711 C187.1@67.48,31.09 ; EM3.2@78.575,31.09 78.575,30.213 v1(78.588,30.201)
LCD_G2: C186.1 EM3.1 J2.20 | length 21.4
  FC1 w0.15: v1(65.202,29.947) 65.604,29.947 65.938,29.612 J2.20@67.347,29.612
  BC2 w0.15: v1(65.202,29.947) 67.513,29.947 69.926,27.534 v1(77.292,27.534)
  BC1 w0.15: v1(77.292,27.534) 77.292,30.429 77.521,30.658 77.775,30.658 EM3.1@77.775,31.09 77.775,31.928 77.48,32.223 C186.1@77.48,33.09
LCD_G3: C191.1 EM2.4 J2.12 | length 25
  FC1 w0.15: v1(65.964,25.563) J2.12@67.347,25.563
  IC2 w0.15: v1(65.964,25.563) 66.375,25.563 66.822,26.01 66.822,34.691 67.894,35.763 72.728,35.763 v1(73.175,36.21)
  BC3 w0.15: v1(73.175,36.21) 73.419,35.966 75.59,35.966 76.022,36.398 v1(76.022,38.607)
  BC1 w0.15: v1(73.175,36.21) EM2.4@73.175,37.09 ; v1(76.022,38.607) 76.48,39.065 C191.1@76.48,39.09
LCD_G4: C184.1 EM2.3 J2.13 | length 20
  FC1 w0.15: J2.13@70.147,26.062 72.54,26.062 73.457,26.09 73.457,25.146
  FC3 w0.15: v1(72.568,37.973) 73.533,37.008 73.533,25.555 v1(73.48,25.502) 73.457,25.146
  BC1 w0.15: EM2.3@72.375,37.09 72.375,37.78 v1(72.568,37.973) ; 73.457,25.146 73.457,26.09 C184.1@73.48,26.09 v1(73.48,25.502)
LCD_NC_L11: L16.2 R229.1 U35.5 | length 135.8
  FC1 w0.15: U35.5@197.12,46.4 v1(197.12,48.153)
  FC4 w0.15: v1(86.106,24.562) 117.272,24.562 119.177,22.657 182.093,22.657 188.417,28.981 188.417,31.063 192.481,35.128 196.698,35.128 197.256,35.687 197.256,48.016 v1(197.12,48.153)
  BC1 w0.15: L16.2@85.212,26.09 85.212,25.455 v1(86.106,24.562) ; v1(197.12,48.153) 197.51,48.543 R229.1@197.51,49.09
LCD_R0: C185.1 EM2.2 J2.14 | length 18.5
  FC1 w0.15: v1(66.319,26.187) 66.446,26.563 J2.14@67.347,26.563
  FC3 w0.15: v1(66.192,23.165) 66.319,23.292 v1(66.319,26.187) 69.619,29.487 69.619,34.237 v1(71.575,36.193)
  BC1 w0.15: v1(66.192,23.165) 66.48,23.452 C185.1@66.48,24.09 ; v1(71.575,36.193) EM2.2@71.575,37.09
LCD_R1: C169.1 EM2.1 J2.15 | length 21.9
  FC1 w0.15: v1(69.113,27.062) J2.15@70.147,27.062
  FC3 w0.15: v1(69.113,27.062) 71.933,29.882 71.933,36.812 v1(70.775,37.97)
  IC3 w0.15: v1(70.775,37.97) 71.534,37.211 75.413,37.211 v1(76.48,36.144)
  BC1 w0.15: EM2.1@70.775,37.09 v1(70.775,37.97) ; v1(76.48,36.144) C169.1@76.48,37.09
LCD_R2: C196.1 EM4.4 J2.21 | length 37
  FC1 w0.15: v1(68.91,30.113) J2.21@70.147,30.113
  BC1 w0.15: v1(68.91,30.113) 69.252,30.113 71.069,28.296 71.069,23.546 71.526,23.089 74.371,23.089 74.854,23.571 74.854,27.915 76.987,30.048 76.987,37.389 77.445,37.846 80.874,37.846 81.48,38.452 ; C196.1@81.48,39.09 81.48,38.452 ; EM4.4@82.175,35.09 82.175,37.605 81.48,38.3 81.48,38.452
LCD_R3: C175.1 EM4.3 J2.22 | length 24.2
  FC1 w0.15: v1(65.527,31.09) 66.019,31.09 66.497,30.612 J2.22@67.347,30.612
  FC2 w0.15: v1(65.527,31.09) 65.527,30.409 66.243,29.693 73.33,29.693 74.93,31.293 80.569,31.293 v1(80.975,31.699)
  BC1 w0.15: C175.1@64.48,31.09 v1(65.527,31.09) ; v1(80.975,31.699) 81.712,32.436 81.712,34.011 81.375,34.347 EM4.3@81.375,35.09
LCD_R4: C178.1 EM4.2 J2.23 | length 17
  FC1 w0.15: 69.116,31.113 J2.23@70.147,31.113
  IC2 w0.15: 69.116,31.113 69.113,31.115 71.247,33.249 79.61,33.249 v1(80.575,34.214)
  BC1 w0.15: v1(80.575,34.214) EM4.2@80.575,35.09 80.575,35.82 81.48,36.725 C178.1@81.48,37.09
LCD_STNDBY#: R393.2 U35.93 U51.11 | length 118.7
  FC1 w0.15: v1(103.49,57.506) v1@103.525,57.541 ; 103.525,56.637 103.525,57.506 v1@103.525,57.541 ; U51.11@103.525,59.1 v1@103.525,57.541 ; v1(199.619,41.25) U35.93@200.72,41.25
  FC4 w0.15: 103.525,56.637 103.48,56.591 111.354,56.591 116.51,61.747 124.333,61.747 125.146,60.935 132.486,60.935 135.28,58.141 138.201,58.141 141.275,55.067 145.618,55.067 146.101,54.585 150.952,54.585 151.994,53.543 153.289,53.543 153.994,54.248 159.95,54.248 161.341,52.857 192.049,52.857 195.834,49.073 200.355,49.073 200.889,48.539 200.889,42.52 v1(199.619,41.25)
  BC1 w0.15: v1(103.49,57.506) R393.2@103.49,59.09
LCD_VAA: C179.1 C190.1 J2.3 L15.1 | length 96.1
  FC1 w0.15: J2.3@70.147,21.062 70.935,21.062 71.083,20.915 v1(73.254,20.915)
  FC2 w0.15: v1(82.387,19.09) 87.96,24.663 107.823,24.663 112.954,29.794 115.138,29.794 115.849,30.505 117.399,30.505 124.231,37.338 152.788,37.338 v1(152.991,37.541)
  BC1 w0.15: v1(73.254,20.915) 73.254,19.09 C190.1@73.775,19.09 ; C179.1@73.48,17.09 73.48,17.932 73.775,18.227 C190.1@73.775,19.09 ; v1(82.387,19.09) C190.1@73.775,19.09 ; L15.1@152.788,39.09 152.788,37.744 v1(152.991,37.541)
M38_21: U6.55 U72.21 | length 90.3
  FC1 w0.15: U6.55@139.71,143.125 139.71,144.313
  BC2 w0.15: 139.71,144.313 154.026,129.997 154.026,127.152 154.432,126.746 161.341,126.746 165.329,122.758 168.478,122.758 175.241,115.995 183.09,115.995 v1(202.37,96.715)
  BC1 w0.15: v1(202.37,96.715) U72.21@207.4,96.715
M38_COM0: U6.77 U43.14 | length 24.5
  FC1 w0.15: v1(142.342,153.772) 143.038,153.075 U6.77@144.26,153.075
  FC3 w0.15: v1(142.342,153.772) 143.104,153.772 143.358,154.026 143.358,159.538 141.86,161.036 141.86,161.468 143.586,163.195 143.586,170.764 143.866,171.044 145.486,171.044 U43.14@146.27,170.26
M38_COM1: U6.76 U43.13 | length 19.3
  FC1 w0.15: U6.76@144.26,152.575 v1(145.44,152.575)
  FC3 w0.15: U43.13@144.47,170.26 144.47,159.339 144.932,158.877 144.932,153.083 v1(145.44,152.575)
M38_COM2: U6.75 U43.12 | length 21.2
  FC1 w0.15: U43.12@142.67,170.26 142.67,166.395 143.027,166.038 143.027,157.378 142.646,156.997 142.646,155.829 143.154,155.321 143.154,154.93 142.942,154.717 142.646,154.717 141.983,154.054 141.983,152.738 142.646,152.075 U6.75@144.26,152.075
M38_COM3: U6.74 U43.11 | length 22.8
  FC1 w0.15: U6.74@144.26,151.575 145.962,151.575 v1(146.38,151.994)
  IC3 w0.15: U43.11@140.87,170.26 146.177,164.953 146.177,152.197 v1(146.38,151.994)
M38_P10_R413: Q42.3 R411.2 R413.1 | length 87.5
  FC1 w0.15: v1(216.59,43.349) Q42.3@216.59,46.8
  IC1 w0.15: v1(216.59,43.349) v1(220.269,39.67)
  BC4 w0.15: 154.51,62.486 154.508,62.484 155.829,61.163 175.108,61.163 175.437,60.834 176.707,60.834 191.313,46.228 208.077,46.228 211.506,42.799 v1(220.269,42.799)
  BC1 w0.15: 154.51,62.486 R413.1@154.51,63.09 ; v1(220.269,39.67) 220.675,39.67 ; v1(220.269,42.799) 220.269,40.076 220.675,39.67 ; R411.2@221.25,39.67 220.675,39.67
M38_P11_R167: Q39.3 R167.1 R171.2 | length 22.2
  BC3 w0.15: v1(138.51,144.729) 138.51,149.203 141.58,152.273 141.58,158.115 v1(142.646,159.182)
  BC1 w0.15: R167.1@138.51,144.09 v1(138.51,144.729) ; R171.2@141.49,163.09 141.49,162.624 142.65,161.464 142.65,159.182 v1@142.65,159.178 ; v1(142.646,159.182) v1@142.65,159.178 ; Q39.3@142.65,158.19 v1@142.65,159.178
M38_P12_R407: Q41.3 R407.2 R408.2 | length 79.9
  FC1 w0.15: Q41.3@212.6,46.75 212.6,45.921 v1(213.868,44.653)
  BC2 w0.15: v1(154.49,60.485) 154.915,60.909 173.101,60.909 173.787,60.223 178.816,60.223 186.588,52.451 202.717,52.451 204.318,50.851 204.318,47.142 205.943,45.517 v1(209.398,45.517)
  BC4 w0.15: v1(209.398,45.517) 210.261,44.653 v1(213.868,44.653) v1(221.04,44.653)
  BC1 w0.15: v1(154.49,60.485) R407.2@154.49,61.09 ; R408.2@221.04,43.62 v1(221.04,44.653)
M38_P13_R390: Q40.3 R385.1 R390.1 | length 28.2
  IC1 w0.15: v1(137.51,161.493) v1(139.65,159.353)
  BC3 w0.15: 137.51,141.484 135.331,143.662 135.331,152.425 134.188,153.568 134.188,158.171 v1(137.51,161.493)
  BC1 w0.15: 137.51,141.484 R390.1@137.51,142.09 ; v1(137.51,161.493) R385.1@137.51,162.09 ; Q40.3@139.65,158.19 v1(139.65,159.353)
M38_P14: U6.42 U73.17 | length 56.6
  FC1 w0.15: v1(133.16,136.791) U6.42@133.16,143.125
  FC3 w0.15: v1(133.16,136.791) 137.465,132.486 137.465,114.935 143.307,109.093 143.307,102.235 144.196,101.346 v1(144.196,93.065)
  BC1 w0.15: v1(144.196,93.065) U73.17@146.137,93.065
M38_P14_Buf: U21.107 U73.3 | length 1
  BC1 w0.15: v1(150.845,93.715) U73.3@151.862,93.715
M38_P15: U6.41 U73.2 | length 66.3
  FC1 w0.15: U6.41@132.56,143.125 132.56,144.069 132.814,144.323 v1(133.172,144.323)
  FC3 w0.15: v1(133.172,144.323) 135.534,141.961 144.856,141.961 144.882,141.935 144.882,126.136 147.269,123.749 147.269,114.91 152.883,109.296 v1(152.883,94.365)
  BC1 w0.15: U73.2@151.862,94.365 v1(152.883,94.365)
M38_P15_Buf: U21.106 U73.18 | length 60.5
  FC1 w0.15: v1(195.021,98.45) 195.174,98.298 195.174,95.047 194.92,94.793 194.92,94.285 195.213,93.991 U21.106@196.732,93.991
  FC2 w0.15: v1(144.78,94.259) 148.361,97.84 183.311,97.84 184.683,99.212 194.259,99.212 v1(195.021,98.45)
  BC1 w0.15: v1(144.78,94.259) 145.324,93.715 U73.18@146.137,93.715
M38_P16_R86: J13.62 R86.1 | length 70.6
  FC3 w0.15: v1(68.428,70.942) 68.428,98.857 73.254,103.683 73.254,120.523 v1(72.415,121.361)
  BC1 w0.15: J13.62@65.207,69.753 67.238,69.753 v1(68.428,70.942) ; v1(72.415,121.361) 80.51,129.456 R86.1@80.51,132.09
M38_P20: J5.19 U6.38 | length 61.1
  FC1 w0.15: U6.38@130.76,146.075 137.007,146.075 v1(137.21,146.278)
  IC2 w0.15: v1(137.21,146.278) 137.414,146.278 142.621,151.486 159.004,151.486 167.488,159.969 167.488,160.934 167.894,161.341 173.635,161.341 179.73,167.436 v1(180.44,167.436)
  BC1 w0.15: v1(180.44,167.436) J5.19@180.44,169.45
M38_P21: J5.22 U6.37 | length 44.3
  FC1 w0.15: U6.37@130.76,146.575 v1(133.121,146.575)
  IC2 w0.15: v1(133.121,146.575) 137.194,150.647 141.3,150.647 144.12,153.467 154.483,153.467 v1(164.135,163.119)
  BC1 w0.15: v1(164.135,163.119) 166.624,163.119 166.84,163.335 J5.22@166.84,164.65
M38_P22_R88: R89.1 U73.8 | length 68.6
  IC3 w0.15: v1(126.746,145.09) 145.415,126.421 145.415,120.828 145.847,120.396 147.117,120.396 147.625,119.888 147.625,111.506 152.527,106.604 152.527,91.237 v1(153.086,90.678)
  BC1 w0.15: R89.1@125.51,145.09 v1(126.746,145.09) ; U73.8@151.862,90.465 152.873,90.465 v1(153.086,90.678)
M38_P27_KB_SPKDN: U6.31 U73.4 | length 67.7
  FC1 w0.15: U6.31@130.76,149.575 131.947,149.575
  IC1 w0.15: 131.947,149.575 131.953,149.581 139.141,142.392 139.141,134.95 145.237,128.854 145.237,113.741 153.238,105.74 153.238,93.421 v1(152.883,93.065)
  BC1 w0.15: U73.4@151.862,93.065 v1(152.883,93.065)
M38_P34: J13.38 R356.1 U6.58 | length 115.5
  FC1 w0.15: U6.58@141.21,143.125 v1(141.21,145.085)
  IC2 w0.15: 70.773,68.953 70.764,68.961 76.073,74.27 84.466,74.27 87.938,77.741 87.938,78.13 88.069,78.261 88.458,78.261 93.316,83.119 93.316,88.598 118.897,114.18 118.897,122.022 139.344,142.469 139.344,144.475 139.954,145.085 v1(141.21,145.085)
  BC1 w0.15: 70.773,68.953 J13.38@72.008,68.953 ; v1(141.21,145.085) 141.51,145.385 R356.1@141.51,146.09
M38_P35: U6.57 U72.20 | length 91.7
  FC1 w0.15: U6.57@140.71,143.125 140.71,144.317
  BC2 w0.15: 140.71,144.317 140.716,144.323 140.716,143.967 157.556,127.127 164.186,127.127 164.694,126.619 164.694,125.501 165.989,124.206 171.004,124.206 178.954,116.256 190.398,116.256 205.613,101.041 v1(205.613,96.065)
  BC1 w0.15: v1(205.613,96.065) U72.20@207.4,96.065
M38_P36: U6.56 U72.22 | length 87.1
  FC1 w0.15: U6.56@140.21,143.125 140.21,141.427 140.616,141.021 v1(142.037,141.021)
  BC4 w0.15: v1(142.037,141.021) 154.686,128.372 162.357,128.372 164.287,126.441 167.869,126.441 168.148,126.162 172.811,126.162 201.608,97.365 v1(204.826,97.365)
  BC1 w0.15: v1(204.826,97.365) U72.22@207.4,97.365
M38_P41: U6.23 U21.111 | length 101.6
  FC1 w0.15: U6.23@130.76,153.575 134.327,153.575 134.798,153.105 135.484,153.105 135.687,153.308 v1(135.687,153.714) ; U21.111@193.682,96.966 193.682,95.726 v1(193.802,95.606)
  IC1 w0.15: v1(135.687,153.714) 135.687,152.705 140.056,148.336 140.056,144.043 148.996,135.103 156.464,135.103 156.997,134.569 156.997,128.346 160.071,125.273 160.071,121.107 160.528,120.65 169.037,120.65 184.912,104.775 184.912,99.771 185.318,99.365 190.449,99.365 193.802,96.012 v1(193.802,95.606)
M38_P43: U6.21 U21.110 | length 99.9
  FC1 w0.15: U6.21@130.76,154.625 v1(132.893,154.625) ; U21.110@194.182,96.966 194.335,97.942 v1(194.564,98.171)
  BC4 w0.15: v1(132.893,154.625) 132.283,154.625 140.31,146.599 140.31,138.836 153.391,125.755 157.023,125.755 160.655,122.123 160.655,118.669 161.29,118.034 171.171,118.034 179.73,109.474 189.078,109.474 191.135,107.417 191.135,104.313 190.854,104.032 190.854,101.881 v1(194.564,98.171)
M38_P44: U6.20 U72.19 | length 114.4
  FC1 w0.15: U6.20@132.56,156.575 132.56,158.697
  BC2 w0.15: 132.56,158.697 132.563,158.699 138.109,158.699 143.472,153.336 149.863,153.336 177.063,126.136 178.816,126.136 183.667,121.285 184.658,121.285 188.468,117.475 198.907,117.475 200.177,116.205 200.177,108.864 210.515,98.527 210.515,97.371 v1(208.559,95.415)
  BC1 w0.15: U72.19@207.4,95.415 v1(208.559,95.415)
M38_P46: J13.39 R288.2 U6.18 | length 139.3
  FC1 w0.15: U6.18@133.71,156.575 133.71,157.882
  IC2 w0.15: 70.769,69.753 79.908,78.892 79.908,83.922 80.12,84.133 86.774,84.133 90.171,87.53 90.171,89.205 90.322,89.357 90.322,91.795 109.922,111.395 109.922,122.241 116.561,128.88 v1(118.897,128.88)
  BC3 w0.15: v1(118.897,128.88) 130.49,140.487 133.528,143.525 133.528,150.546 133.248,150.825 133.248,157.582 133.549,157.882 133.71,157.882
  BC1 w0.15: 70.769,69.753 J13.39@72.008,69.753 ; v1(118.897,128.88) 130.49,140.487 R288.2@130.49,141.09
M38_P52: J5.18 U6.14 | length 58.3
  FC1 w0.15: U6.14@135.71,156.575 135.71,157.632 138.176,160.098 v1(138.176,170.002)
  FC2 w0.15: v1(138.176,170.002) 138.176,169.799 138.379,169.596 178.232,169.596 v1(179.629,170.993)
  BC1 w0.15: v1(179.629,170.993) 179.64,170.982 J5.18@179.64,169.45
M38_P53: J5.23 U6.13 | length 40.3
  FC1 w0.15: v1(136.21,154.6) U6.13@136.21,156.575
  IC2 w0.15: v1(136.21,154.6) 139.217,157.607 144.196,157.607 146.075,159.487 156.616,159.487 163.805,166.675 v1(167.348,166.675)
  BC1 w0.15: v1(167.348,166.675) 167.64,166.383 J5.23@167.64,164.65
M38_P60: J5.1 U6.8 | length 37.5
  FC1 w0.15: U6.8@138.71,156.575 v1(138.71,162.966)
  FC4 w0.15: v1(138.71,162.966) 161.369,162.966 165.038,166.635 165.202,166.635 165.99,167.424 v1(165.99,167.919)
  BC1 w0.15: v1(165.99,167.919) J5.1@165.99,169.45
M38_P61: J5.2 U6.7 | length 41.9
  FC1 w0.15: U6.7@139.21,156.575 139.21,160.8 140.03,161.62 140.03,162.484 142.011,164.465 v1(142.011,170.993)
  BC1 w0.15: v1(142.011,170.993) 166.778,170.993 166.79,170.981 J5.2@166.79,169.45
M38_P63: J5.40 U6.5 | length 49.9
  FC1 w0.15: 140.21,155.399 U6.5@140.21,156.575
  FC2 w0.15: 140.21,155.399 142.886,158.075 v1(181.29,158.075)
  BC1 w0.15: v1(181.29,158.075) J5.40@181.29,164.65
M38_P64: J5.34 U6.4 | length 41
  FC1 w0.15: U6.4@140.71,156.575 v1(140.71,158.344)
  FC2 w0.15: v1(140.71,158.344) 140.964,158.598 145.263,158.598 147.218,160.553 156.058,160.553 158.013,162.509 v1(175.819,162.509)
  BC1 w0.15: v1(175.819,162.509) 176.44,163.13 J5.34@176.44,164.65
M38_P65: C137.2 R214.2 U6.3 U44.1 | length 12.1
  FC1 w0.15: 141.21,155.028 U6.3@141.21,156.575
  IC2 w0.15: 141.21,155.028 141.224,155.014 142.242,156.032 v1(143.002,156.032)
  BC1 w0.15: v1(143.002,156.032) 143.01,156.04 U44.1@143.95,156.04 147.096,156.04 147.52,156.464 C137.2@147.52,157.09 147.52,158.572 147.49,158.602 R214.2@147.49,160.09
M38_P66: C138.2 R212.2 U6.2 U44.7 | length 20.9
  FC1 w0.15: v1(138.989,155.39) 139.745,154.634 141.374,154.634 141.71,154.969 U6.2@141.71,156.575
  FC2 w0.15: v1(134.749,154.5) 135.639,155.39 v1(138.989,155.39)
  IC2 w0.15: v1(133.502,162.484) 135.738,160.249 135.738,155.488 v1(134.749,154.5)
  BC1 w0.15: R212.2@133.49,163.09 133.502,163.09 v1(133.502,162.484) ; C138.2@134.52,155.09 134.52,154.729 v1(134.749,154.5) ; U44.7@138.05,155.39 v1(138.989,155.39)
M38_P67: J13.61 R60.2 U6.1 | length 134.6
  FC1 w0.15: R60.2@62.57,69.37 v1(62.57,70.553) ; v1(142.26,155.143) U6.1@142.26,156.575
  IC4 w0.15: v1(92.812,123.469) 106.934,137.592 123.825,137.592 130.277,144.043 130.277,146.406 135.763,151.892 139.009,151.892 v1(142.26,155.143)
  BC3 w0.15: v1(66.802,70.553) 66.802,82.118 78.944,94.26 78.944,102.54 78.842,102.642 78.842,103.175 92.812,117.144 v1(92.812,123.469)
  BC1 w0.15: v1(62.57,70.553) J13.61@65.207,70.553 v1(66.802,70.553)
M38_P71: D4.2 R44.2 U5.3 U6.26 | length 55.4
  FC1 w0.15: v1(127.904,152.197) 128.026,152.075 U6.26@130.76,152.075
  FC2 w0.15: v1(127.904,152.197) 128.575,152.197 129.515,151.257 133.248,151.257 133.807,150.698 143.841,150.698 145.491,149.048 148.467,149.048 v1(150.774,146.74)
  BC1 w0.15: v1(150.774,146.74) 151.181,146.74 ; U5.3@152.862,146.74 151.181,146.74 ; D4.2@157.55,158.34 157.55,158.909 ; R44.2@158.49,163.09 158.49,161.163 157.55,160.223 157.55,158.909 ; 151.181,146.74 150.571,147.35 150.571,149.682 151.003,150.114 151.003,159.512 151.13,159.639 153.492,159.639 153.949,159.182 157.277,159.182 157.55,158.909
M38_RESET: C99.2 R81.1 R282.2 U6.25 U30.4 U53.1 | length 56.4
  FC1 w0.15: U6.25@130.76,152.575 v1(131.94,152.575) ; v1(159.188,154.686) U30.4@160.206,154.686
  FC2 w0.15: v1(131.94,152.575) 140.18,152.575 140.945,153.34 151.079,153.34 152.425,154.686 v1(159.188,154.686)
  IC3 w0.15: v1(129.032,144.09) 129.032,148.289 v1(129.407,148.665)
  IC4 w0.15: v1(159.188,154.686) 164.674,160.172 168.192,160.172 v1(168.51,160.49)
  BC3 w0.15: v1(129.407,148.665) 131.699,150.956 131.699,152.334 v1(131.94,152.575)
  BC1 w0.15: v1(129.032,144.09) C99.2@130.52,144.09 ; v1(129.407,148.665) 129.84,148.665 130.465,148.04 U53.1@131.16,148.04 ; v1(168.51,160.49) R81.1@168.51,161.09 ; v1(170.49,160.49) R282.2@170.49,161.09
M38_SEG0: U6.70 U43.1 | length 32.8
  FC1 w0.15: U6.70@144.26,149.575 145.548,149.575 145.644,149.48 145.516,149.48
  BC4 w0.15: U43.1@122.87,170.26 132.754,160.376 134.62,160.376 145.516,149.48
M38_SEG1: U6.69 U43.2 | length 36
  FC1 w0.15: v1(140.386,149.835) 141.145,149.075 U6.69@144.26,149.075
  IC3 w0.15: U43.2@124.67,170.26 124.67,157.683 125.127,157.226 128.6,157.226 133.96,151.867 138.836,151.867 140.386,150.317 v1(140.386,149.835)
M38_SEG2: U6.68 U43.3 | length 31
  FC1 w0.15: U6.68@144.26,148.575 145.237,148.575 v1(145.44,148.372)
  IC3 w0.15: U43.3@126.47,170.26 140.571,156.159 140.571,154.831 144.45,150.952 144.45,149.362 v1(145.44,148.372)
M38_SEG3: U6.67 U43.4 | length 33.2
  FC1 w0.15: v1(142.596,147.592) 143.078,148.075 U6.67@144.26,148.075
  IC1 w0.15: U43.4@128.27,170.26 134.417,164.113 134.417,156.87 134.849,156.439 136.55,156.439 137.02,155.969 137.02,151.93 142.138,146.812 142.443,146.812 142.596,146.964 v1(142.596,147.592)